# Altium PCB 106015_D3C_Single.PcbDoc
Units mil, origin at the board's own origin, x right, y up, seen from the top; angles counter-clockwise.
Board outline 4155 x 3505 mil, 2 copper layers (Top Layer, Top, Bottom Layer, Bottom); 78 components, 65 nets, 255 pads, 49 vias.
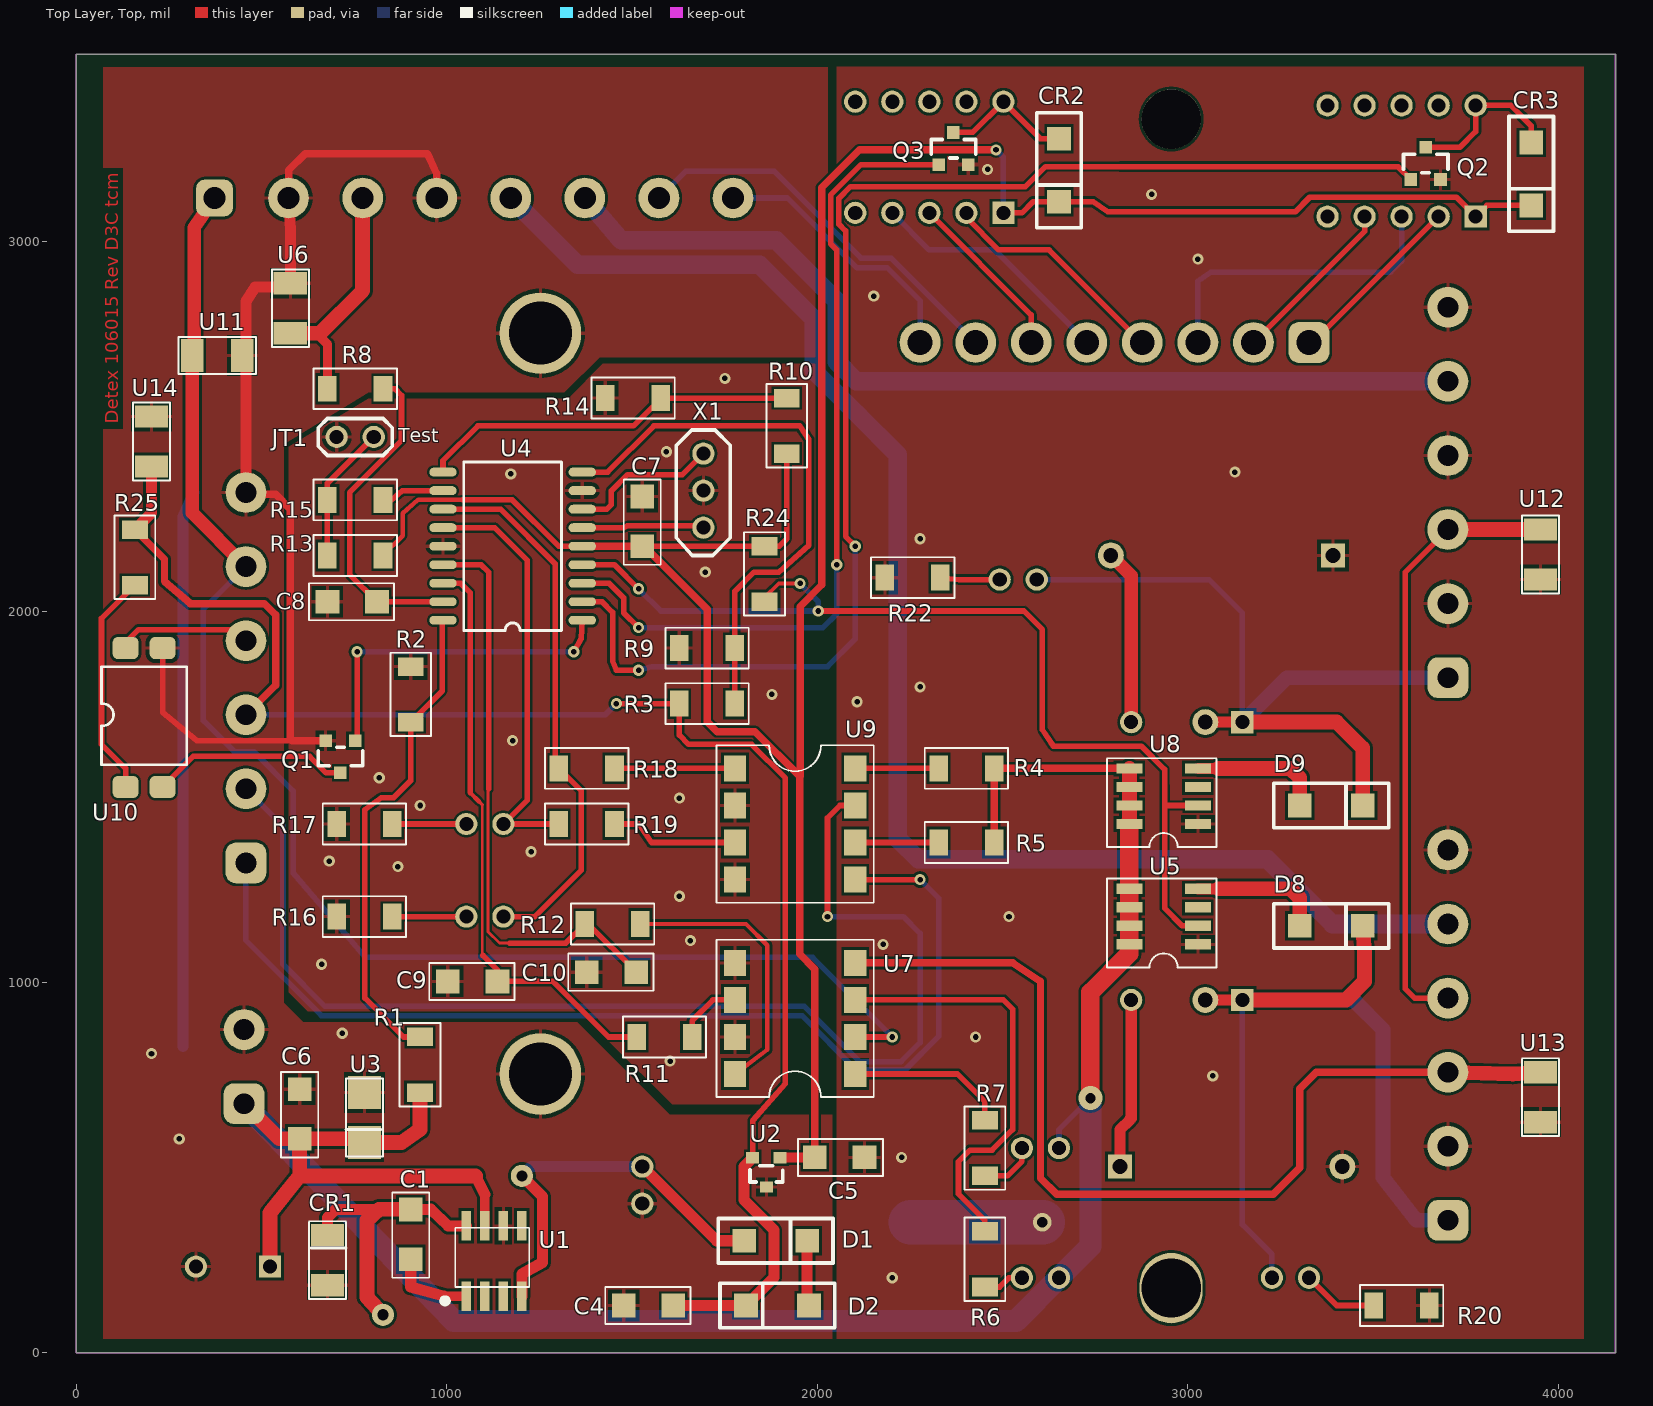
[diagram p0: Top Layer, Top view]
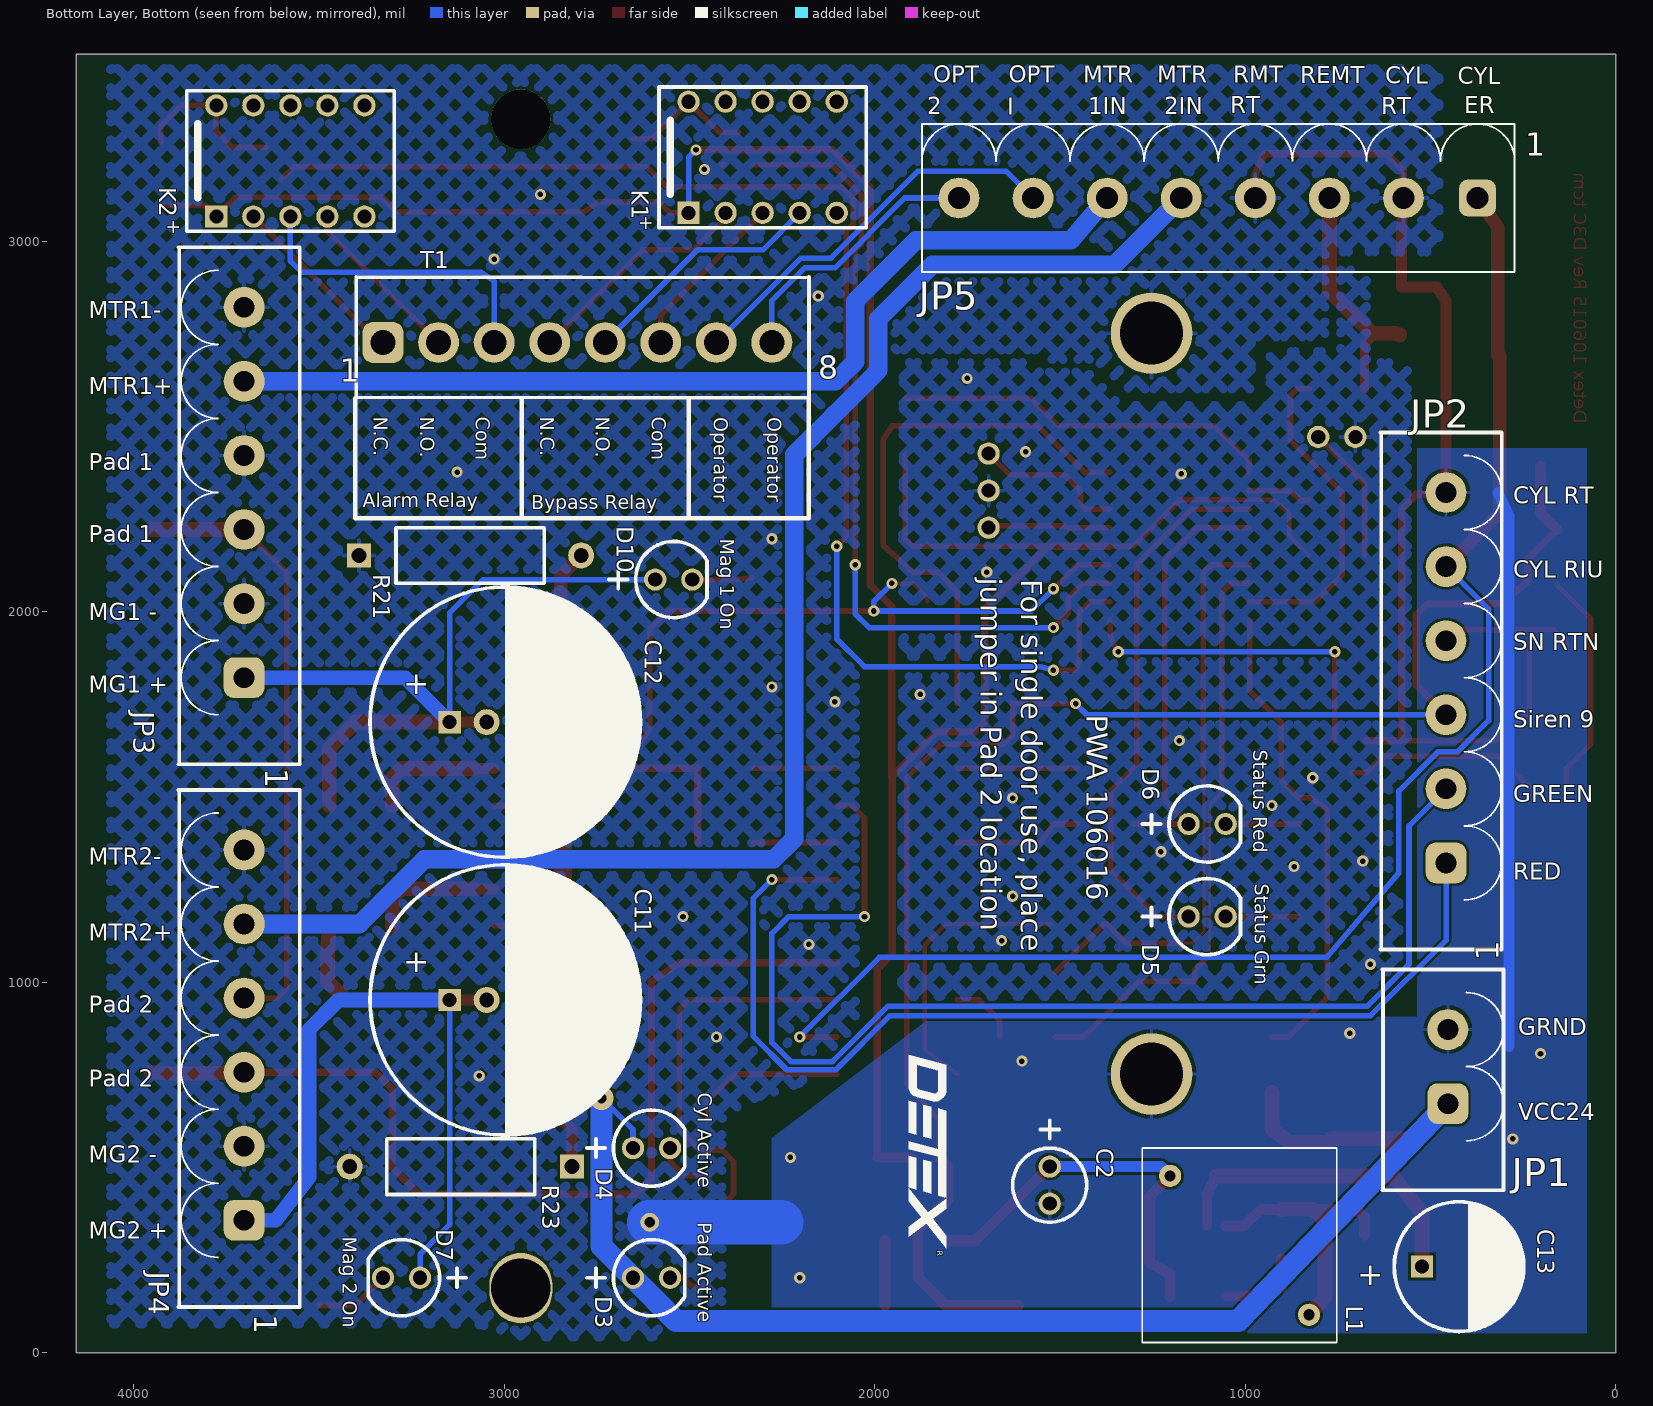
[diagram p1: Bottom Layer, Bottom view, seen from below]

## Layer stack, top to bottom
Top Solder, Top Mask: solder mask 0.4, Solder Resist, Dk 3.5
Top Layer, Top: signal copper 1.4
Dielectric 1: dielectric 12.6, FR-4, Dk 4.8
Bottom Layer, Bottom: signal copper 1.4
Bottom Solder, Bot Mask: solder mask 0.4, Solder Resist, Dk 3.5

## Board outline
0,2.5 0,0 4155,0 4155,3500 4155,3502.5 4155,3505 2.5,3505 0,3505

## Design rules (kind name [scope] priority, off if disabled: settings)
BoardOutlineClearance [All] p1: gap=15 ignorepadtopadclearanceinfootprint=FALSE except(0: Arc-SplitContinuation Track-SplitContinuation SMDPad-SplitContinuation THPad-SplitContinuation Via-SplitContinuation Fill-SplitContinuation Poly-SplitContinuation Region-SplitContinuation Text-SplitContinuation)
Clearance "Clearance_Bottom Layer, Bottom" [ExistsOnLayer('Bottom Layer, Bottom') vs ExistsOnLayer('Bottom Layer, Bottom')] p1 off: gap=7 ignorepadtopadclearanceinfootprint=FALSE
Clearance [All] p2: gap=7 ignorepadtopadclearanceinfootprint=FALSE
HoleSize [All] p1: absolutevalues=TRUE maxlimit=200 minlimit=1 maxpercent=80.000 minpercent=20.000
MinimumAnnularRing [All] p1: minimumring=5
PlaneClearance [All] p1: clearance=10
PolygonConnect [All vs IsVia] p1: connectstyle=Direct reliefconductorwidth=10 reliefentries=4 polygonreliefangle="90 Angle" airgapwidth=10
PolygonConnect PolygonConnect_1 [All] p2: connectstyle=Relief reliefconductorwidth=10 reliefentries=4 polygonreliefangle="90 Angle" airgapwidth=10
RoutingVias [All] p1: holewidth=28 width=50 viastyle="Through Hole" minholewidth=28 minwidth=50 maxholewidth=28 maxwidth=50
SilkToSilkClearance [All] p1 off: silktosilkclearance=10
SilkToSolderMaskClearance [IsPad] p1 off: minsilkscreentomaskgap=10 clearancetoexposedcopper=TRUE
SolderMaskExpansion [All] p1: expansion=4
UnConnectedPin [All] p1:
UnRoutedNet [All] p1: checkbadconnections=TRUE
Width Net_Width_3 [InNet('VIN_24')] p1: maxlimit=60 minlimit=15 preferedwidth=40
Width Net_Width_2 [InNet('MAG1OUT') Or InNet('MOTOR_1') Or InNet('MAG2OUT') Or InNet('MOTOR_2')] p2: maxlimit=60 minlimit=7 preferedwidth=30
Width Net_Width_1 [InNet('GND') Or InNet('+5V')] p3: maxlimit=200 minlimit=7 preferedwidth=15
Width [All] p4: maxlimit=100 minlimit=7 preferedwidth=10
25 further rules are at their usual default settings.

## Components (designator, comment, footprint, x,y, rotation, side; value= is the part's Value field where it differs from the comment)
C1 "10pf" CC1206_CC1206_NP(Primary) 902.5,252.5 r90 top
C2 "82 UF 35v" CAP100RP_CAP100RP(Primary) 1527.5,502.5 r270 bottom
C4 ".01" CC1206_CC1206(Primary) 1477.5,127.5 r0 top
C5 ".01" CC1206_CC1206(Primary) 2127.5,527.5 r180 top
C6 ".01" CC1206_CC1206_NP(Primary) 602.5,577.5 r90 top
C7 ".1mfd" CC1206_CC1206_NP(Primary) 1527.5,2177.5 r90 top
C8 ".1" CC1206_CC1206_NP(Primary) 677.5,2027.5 r0 top
C9 ".1" CC1206_CC1206_NP(Primary) 1002.5,1002.5 r0 top
C10 ".1" CC1206_CC1206_NP(Primary) 1377.5,1027.5 r0 top
C11 "100 uF" CAP300 3147.5,952.5 r180 bottom
C12 "100 uF" CAP300 3147.5,1702.5 r180 bottom
C13 "220uF 50v" CAP200 522.5,232.5 r180 bottom
CR1 "60V" SMBJ#1 677.5,182.5 r270 top
CR2 "{Value}" 1N4004SMT 2652.5,3277.5 r270 top
CR3 "{Value}" 1N4004SMT 3927.5,3267.5 r270 top
D1 "{Value}" 1N4004SMT 1802.5,302.5 r0 top
D2 "{Value}" 1N4004SMT 1977.5,127.5 r180 top
D3 "Blue" LED 2652.5,202.5 r180 bottom
D4 "White" LED 2652.5,552.5 r180 bottom
D5 "Green" LED 1152.5,1177.5 r180 bottom
D6 "Red" LED 1152.5,1427.5 r180 bottom
D7 "Yellow" LED 3227.5,202.5 r0 bottom
D8 "1N4937" 1N4004SMT 3302.5,1152.5 r0 top
D9 "1N4937" 1N4004SMT 3302.5,1477.5 r0 top
D10 "Yellow" LED 2592.5,2087.5 r180 bottom
JP1 "" HDR_200SP_2C 452.5,672.5 r180 bottom
JP2 "" HDR_200SP_6C 457.5,1322.5 r180 bottom
JP3 "" HDR_200SP_6C 3702.5,1822.5 r180 bottom
JP4 "" HDR_200SP_6C 3702.5,357.5 r180 bottom
JP5 "" HDR_200_8C 372.5,3117.5 r270 bottom
JT1 "TEST" JMP2 802.5,2472.5 r180 top
K1 "" AZ_940 2502.5,3077.5 r90 bottom
K2 "" AZ_940 3777.5,3067.5 r90 bottom
L1 "173" PULSE_TH_P075 1202.5,477.5 r270 bottom
Q1 "" SOT-23(GSD)_MOSFETN_SMT(Primary) 752.5,1652.5 r180 top
Q2 "" SOT-23(GSD)_MOSFETN_SMT(Primary) 3602.5,3167.5 r0 top
Q3 "" SOT-23(GSD)_MOSFETN_SMT(Primary) 2327.5,3207.5 r0 top
R1 "240k" RES_1206 927.5,852.5 r270 top
R2 "100k" RES_1206 902.5,1852.5 r270 top
R3 "10M" RES_1206 1777.5,1752.5 r180 top
R4 "1.5k" RES_1206 2477.5,1577.5 r180 top
R5 "1.5k" RES_1206 2477.5,1377.5 r180 top
R6 "1.5k" RES_1206 2452.5,177.5 r90 top
R7 "1.5k" RES_1206 2452.5,477.5 r90 top
R8 "10k" RES_1206 677.5,2602.5 r0 top
R9 "5.6M" RES_1206 1627.5,1902.5 r0 top
R10 "100k" RES_1206 1917.5,2577.5 r270 top
R11 "10k" RES_1206 1512.5,852.5 r0 top
R12 "10k" RES_1206 1522.5,1157.5 r180 top
R13 "10k" RES_1206 827.5,2152.5 r180 top
R14 "100k" RES_1206 1427.5,2577.5 r0 top
R15 "10k" RES_1206 827.5,2302.5 r180 top
R16 "330" RES_1206 702.5,1177.5 r0 top
R17 "330" RES_1206 702.5,1427.5 r0 top
R18 "330" RES_1206 1302.5,1577.5 r0 top
R19 "330" RES_1206 1302.5,1427.5 r0 top
R20 "1.5k" RES_1206 3502.5,127.5 r0 top
R21 "10 Ohms" RES600 3392.5,2152.5 r180 bottom
R22 "1.5k" RES_1206 2332.5,2092.5 r180 top
R23 "10 Ohms" RES600 2817.5,502.5 r0 bottom
R24 "100k" RES_1206 1857.5,2177.5 r270 top
R25 "2.2kk" RES_1206 157.5,2222.5 r270 top
T1 "" HDR_381MSP_8C 3327.5,2727.5 r270 bottom
U1 "" S08 1052.5,152.5 r90 top
U2 "" SOT-23 1902.5,527.5 r180 top
U3 "SMBJ43" SMBJ#2 777.5,702.5 r90 top
U4 "" SOIC18 1177.5,2177.5 r180 top
U5 "" IPS511G 3027.5,1102.5 r180 top
U6 "6.3v" D0214 577.5,2752.5 r270 top
U7 "" MCT9001 2102.5,752.5 r180 top
U8 "" IPS511G 3027.5,1427.5 r180 top
U9 "" MCT9001 1777.5,1577.5 r0 top
U10 "" SFH6168 132.5,1527.5 r90 top
U11 "7.5" D0214 447.5,2692.5 r0 top
U12 "7.5" D0214 3952.5,2222.5 r90 top
U13 "7.5" D0214 3952.5,757.5 r90 top
U14 "12v" D0214 202.5,2527.5 r90 top
X1 "8 Mhz" RES_CER 1692.5,2227.5 r90 top

## Footprints (in the part's own frame and the unit in brackets; to place one, negate y for a bottom-side part, rotate by r counter-clockwise, add the part's x,y. Pads: shape width x height; smd on the part's side, far side on the other; paste and mask are expansions set on the pad)
1N4004SMT [mil]
  rect 64x64 smd: 1(0,0) 2(170,0)
  silkscreen extent -70,-60 240,60
AZ_940 [mil]
  rect 60x60 hole 38: 1(0,0)
  round 60 hole 38: 2(0,-100) 3(0,-200) 4(0,-300) 5(0,-400) 6(300,-400) 7(300,-300) 8(300,-200) 9(300,-100) 10(300,0)
  silkscreen extent -40,-480 340,80
CAP100RP_CAP100RP(Primary) [mil]
  round 60 hole 38: MINUS(100,0) PLUS(0,0)
  silkscreen extent -125,-100 150,100
CAP200 [mil]
  rect 60x60 hole 38: 1(0,0)
  round 60 hole 38: 2(200,0)
  silkscreen extent -75,-175 275,175
CAP300 [mil]
  rect 60x60 hole 38: 1(0,0)
  round 60 hole 38: 2(300,0)
  silkscreen extent -215,-365 515,365
CC1206_CC1206(Primary) [mil]
  rect 64x64 smd: A(0,0) B(134,0)
  silkscreen extent -50,-50 180,50
CC1206_CC1206_NP(Primary) [mil]
  rect 64x64 smd: A(0,0) B(134,0)
  silkscreen extent -50,-50 180,50
D0214 [mil]
  rect 60x90 smd: 1(0,0) 2(-135,0)
  silkscreen extent -172,-50 38,50
HDR_200_8C [mil]
  rrect50% 100x100 hole 60: 1(0,0)
  round 110 hole 60: 2(0,-200) 3(0,-400) 4(0,-600) 5(0,-800) 6(0,-1000) 7(0,-1200) 8(0,-1400)
  silkscreen extent -200,-1500 200,100
HDR_200SP_2C [mil]
  rrect50% 110x110 hole 56: 1(0,0)
  round 110 hole 56: 2(0,200)
  silkscreen extent -177,-234 150,362
HDR_200SP_6C [mil]
  rrect50% 110x110 hole 56: 1(0,0)
  round 110 hole 56: 2(0,200) 3(0,400) 4(0,600) 5(0,800) 6(0,1000)
  silkscreen extent -177,-234 150,1162
HDR_381MSP_8C [mil]
  rrect50% 110x110 hole 67: 1(0,0)
  round 110 hole 67: 2(0,150) 3(0,300) 4(0,450) 5(0,600) 6(0,750) 7(0,900) 8(0,1050)
  silkscreen extent -177,-72 150,1150
IPS511G [mil]
  rect 70x28 smd: 1(0,0) 2(0,-50) 3(0,-100) 4(0,-150) 5(185,-150) 6(185,-100) 7(185,-50) 8(185,0)
  silkscreen extent -50,-178 245,63
JMP2 [mil]
  round 60 hole 38: 1(0,0) 2(100,0)
  silkscreen extent -50,-50 150,50
LED [mil]
  round 60 hole 38: 1(0,0) 2(100,0)
  silkscreen extent -125,-103 140,103
MCT9001 [mil]
  rect 60x70 smd: 1(0,0) 2(0,-100) 3(0,-200) 4(0,-300) 5(325,-300) 6(325,-200) 7(325,-100) 8(325,0)
  silkscreen extent -50,-362 375,63
PULSE_TH_P075 [mil]
  round 60 hole 30: 1(0,0) 2(375,375)
  silkscreen extent -75,-75 450,450
RES600 [mil]
  rect 65x65 hole 40: 1(0,0)
  round 70 hole 40: 2(600,0)
  silkscreen extent 100,-75 500,75
RES_1206 [mil]
  rect 50x70 smd: 1(0,0) 2(150,0)
  silkscreen extent -38,-55 188,55
RES_CER [mil]
  round 60 hole 38: 1(0,0) 2(100,0) 3(200,0)
  silkscreen extent -75,-72 264,73
S08 [mil]
  rect 80x26 smd: 1(0,0) 2(0,-50) 3(0,-100) 4(0,-150) 5(190,-150) 6(190,-100) 7(190,-50) 8(190,0)
  silkscreen extent -25,-170 185,71
SFH6168 [mil]
  rrect50% 60x70 smd: 1(0,0) 2(0,-100) 3(375,-100) 4(375,0)
  silkscreen extent 60,-165 325,65
SMBJ#1 [mil]
  rect 60x90 smd: 1(0,0) 2(-135,0)
  silkscreen extent -172,-50 38,50
SMBJ#2 [mil]
  rect 90x90 smd: 1(0,0) 2(-135,0)
  silkscreen extent -172,-50 38,50
SOIC18 [mil]
  oval 74x24 smd: 1(-188,200) 2(-188,150) 3(-188,100) 4(-188,50) 5(-188,0) 6(-188,-50) 7(-188,-100) 8(-188,-150) 9(-188,-200) 10(188,-200) 11(188,-150) 12(188,-100) 13(188,-50) 14(188,0) 15(188,50) 16(188,100) 17(188,150) 18(188,200)
  silkscreen extent -132,-227 132,227
SOT-23 [mil]
  rect 35x31 smd: 1(3,1) 2(77,1) 3(40,80)
SOT-23(GSD)_MOSFETN_SMT(Primary) [mil]
  rect 34x34 smd: D(40,87) G(0,0) S(80,0)
  silkscreen extent -20,18 100,68

## Part data
C4 C5 C6 C7 C8 C9 C10: "Capacitor"
C12: "Nichicon UP2A101MHD"
CR1: "Tunnel Diode"
CR2 CR3: "Diode"
Q1 Q2 Q3: "N-Channel, MOSFET Transistor"
R1 R2 R3 R4 R5 R6 R7 R8 R9 R10 R11 R12 R13 R14 R15 R16 R17 R18 R19 R20 R22 R24 R25: "Resistor"
U2: "PNP Darlington Bipolar Transistor"

## Free pads (board coordinates)
  round 220 hole 170: 0(1252.5,752.5) 0(1252.5,2752.5)
  oval 170x190 hole 160 unplated: 0(2955.5,174.5)
  round 160 hole 160 unplated: 0(2955.5,3330.5)
  round 70 hole 40: 0(3047.5,952.5) 0(3047.5,1702.5)

## Via types
v1: diameter 30, hole 15, Top Layer, Top to Bottom Layer, Bottom, 45 vias
v2: diameter 30, hole 15, Top Layer, Top to Bottom Layer, Bottom, tented both sides, 2 vias
v3: diameter 64, hole 28, Top Layer, Top to Bottom Layer, Bottom, 1 vias
v4: diameter 50, hole 28, Top Layer, Top to Bottom Layer, Bottom, 1 vias

## Nets (pads, with @x,y where several pads share a name; then routed paths per layer and width w, separated by ;. In a path a pad name is that pad's centre, name@x,y a point inside that pad or via, vN(x,y) a via of type N, cw(c..) or ccw(c..) an arc to the next point about the centre after c; other vN are vias at no path point)
9VOPTO: R25.2 U10.1 | length 609.2
  Top Layer, Top w15: U10.1 132.5,1577.5 67.5,1642.5 67.5,1982.5 R25.2
2674_FB: C2.PLUS D1.1 L1.1 U1.4 | length 1057.6
  Top Layer, Top w30: U1.4 1202.5,212.5 1258,243.33 1258,422 L1.1 ; C2.PLUS 1727.5,302.5 D1.1
  Bottom Layer, Bottom w30: L1.1@1214,489 1227.5,502.5 C2.PLUS
+5V: C5.B C7.A CR2.2 CR3.2 K1.1 K2.1 R10.2 R13.1 R24.1 U2.1 U4.5 | length 7285.1
  Top Layer, Top w12: R13.1 880.9,2205.9 880.9,2266.84 922.5,2302.5 1042.5,2302.5
  Top Layer, Top w15: 1042.5,2302.5 1176.5,2302.5 1301.5,2177.5 U4.5 ; C7.A 1532.5,2177.5 R24.1 ; R24.1@1857.5,2182.5 R24.1 ; U2.1@1892.5,527.5 U2.1 ; R10.2 1917.5,2197.5 1897.5,2177.5 R24.1 ; C5.B@1992.5,527.5 C5.B ; K1.1 2552.5,3077.5 2582.5,3107.5 CR2.2 2745.36,3107.5 2783.93,3080.5 3290.5,3080.5 3329.54,3119.54 3725.46,3119.54 K2.1 3807.5,3097.5 CR3.2
  Top Layer, Top w20: U4.5 C7.A ; C7.A@1532.5,2177.5 1702.5,2007.5 1702.5,1703.5 1729.3,1676.7 1831.9,1676.7 1952.5,1556.1 1952.5,1076.6 1993.5,1035.6 C5.B ; 1953.25,1555.35 1953.54,1555.64 1953.54,2014.8 2011.5,2072.76 2011.5,3145.01 2113.99,3247.5 v2(2482.5,3247.5)
  Top Layer, Top w28: U2.1 C5.B@1992.5,527.5
  Bottom Layer, Bottom w15: v2(2482.5,3247.5) 2502.5,3227.5 K1.1
ALMC: K2.3 T1.3 | length 855.4
  Bottom Layer, Bottom w15: T1.3 3027.5,2892.5 3062.5,2917.5 3547.5,2917.5 3577.5,2947.5 K2.3
ALMNC: K2.2 T1.1 | length 490.8
  Top Layer, Top w15: T1.1 3337.5,2727.5 K2.2
ALMNO: K2.4 T1.2 | length 464.3
  Top Layer, Top w15: T1.2 3477.5,3027.5 K2.4
ALRM_CNTRL: Q2.G U4.2 | length 3731.8
  Top Layer, Top w15: U4.2 1419,2027.5 1447.5,1999 1447.5,1867.5 1457.5,1842.5 v1(1517.5,1842.5) ; v1(2102.5,2177.5) 2076.33,2203.67 2076.33,3028.67 2058,3047 2058,3116.39 2089.94,3148.33 2562.01,3148.33 2616.18,3202.5 2815,3202.5 2817.3,3201.75 3568.25,3201.75 Q2.G
  Bottom Layer, Bottom w15: v1(1517.5,1842.5) 1552.5,1852.5 2028.1,1852.5 2102.5,1926.9 v1(2102.5,2177.5)
BAT_CHECK_IN: R3.1 R9.2 U4.9 | length 1521.1
  Top Layer, Top w15: U4.9 1433.77,2377.5 1558.77,2502.5 1952.5,2502.5 1977.5,2465 1977.5,2179.97 1895.97,2107.5 1829.2,2107.5 1777.5,2055.8 R9.2 R3.1
BPC: K1.3 T1.6 | length 463.9
  Top Layer, Top w15: K1.3 2302.5,3077.25 2577.5,2802.25 T1.6
BPNC: K1.2 T1.4 | length 627.6
  Top Layer, Top w15: K1.2 2402.5,3064.4 2489.4,2977.5 2625.5,2977.5 2875.5,2727.5 T1.4
BPNO: K1.4 T1.5 | length 671.1
  Bottom Layer, Bottom w15: K1.4 2202.5,3077 2302,2977.5 2479,2977.5 2727.5,2729 T1.5
BYPS_CNTRL: Q3.G U4.3 | length 2238.9
  Top Layer, Top w15: U4.3 1438.1,2077.5 1477.5,2038.1 1477.5,1997.5 v1(1517.5,1957.5) ; v1(2052.5,2127.5) 2052.5,2977.5 2036,2994 2036,3125.5 2118,3207.5 Q3.G
  Bottom Layer, Bottom w15: v1(1517.5,1957.5) 2015.1,1957.5 2052.5,1994.9 v1(2052.5,2127.5)
CYL_OUT: JP2.5 JP5.1 U7.2 U11.2 | length 3994.9
  Top Layer, Top w15: U7.2 v1(2202.5,852.5)
  Top Layer, Top w36: JP5.1 317.5,3037.5 317.5,2692.5 U11.2 312.5,2267.5 JP2.5
  Bottom Layer, Bottom w15: JP2.5 342.5,2007.5 342.5,1706.4 426.4,1622.5 479.25,1622.5 585,1516.75 585,1295.02 780.01,1067.5 1987.5,1067.5 v1(2202.5,852.5)
CYL_OUTPUT: C10.B R12.2 U4.15 | length 1591
  Top Layer, Top w8: 1112.5,1522.5 1111.5,1521.5 1111.5,1472.87 1111.25,1472.62 1111.25,1136.35 1141.7,1105.9 1169.11,1105.9
  Top Layer, Top w15: U4.15 1092.5,2127.5 1112.5,2107.5 1112.5,1522.5 ; 1169.11,1105.9 1320.9,1105.9 R12.2 1381.5,1157.5 C10.B
CYL_SERIES: R12.1 U7.8 | length 757.6
  Top Layer, Top w12: R12.1 1807.5,1157.5 1865,1100 1865,818.12 U7.8
GND: C2.MINUS C4.A C5.A C6.B C7.B C8.A C9.A C10.A C13.2 CR1.1 JP1.2 JP2.6 JP3.2 JP3.4 JP3.6 JP4.2 JP4.6 JP5.2 JP5.4 JT1.2 pad.0@1252.5,752.5 pad.0@1252.5,2752.5 Q1.S Q2.S Q3.S R2.1 R9.1 R14.1 R16.1 R17.1 R20.2 R21.1 R22.2 R23.2 U1.6 U2.3 U3.1 U4.8 U4.14 U5.1 U6.2 U7.5 U7.7 U8.1 U9.2 U9.4 U10.3 U11.1 U12.2 U13.2 U14.1 X1.2 | length 4789
  Top Layer, Top w15: U10.3 232.5,1729.72 325.16,1652.5 582.5,1652.5 ; JP2.6 457.5,2302.5 JP2.6@462.5,2317.5 ; U6.2@577.5,2877.5 U6.2 ; Q3.S Q3.S@2412.5,3207.5
  Top Layer, Top w20: JP2.6@462.5,2317.5 537.5,2317.5 577.5,2277.5 577.5,1660.83 582.5,1652.5 Q1.S ; JP5.2 572.5,3192.5 617.5,3237.5 947.5,3237.5 972.5,3182.5 JP5.4
  Top Layer, Top w30: JP2.6 457.5,2837.5 482.5,2877.5 U6.2@577.5,2877.5 ; JP5.2 577.5,3032.5 U6.2
  Bottom Layer, Bottom w30: 287.5,827.5 287.5,2257.5 317.5,2322.5
  Bottom Layer, Bottom w120: 2252.5,352.5 v4(2607.5,352.5) v4@2609,352.5
  other v1: 2202.5,202.5 2227.5,527.5 277.5,577.5 3067.5,747.5 1602.5,787.5 202.5,807.5 2427.5,852.5 717.5,862.5 661.94,1049 2177.5,1102.5 1657.5,1112.5 2517.5,1177.5 1627.5,1232.5 867.5,1312.5 682.5,1327.5 1227.5,1352.5 927.5,1477.5 1627.5,1497.5 817.5,1552.5 1177.5,1652.5 2107.5,1757.5 1877.5,1777.5 2277.5,1797.5 1697.5,2107.5 2277.5,2197.5 1172.5,2372.5 3127.5,2377.5 1592.5,2432.5 1750.62,2630.43 2152.5,2852.5 3027.5,2952.5 2902.5,3127.5
  other v2: 2460,3195
GREEN_DRIVE: D5.1 R18.1 U4.12 | length 1482.3
  Top Layer, Top w15: U4.12 1144.9,2277.5 1292.2,2130.2 1292.2,1587.8 R18.1 1362.5,1517.5 1362.5,1302.5 1237.5,1177.5 D5.1
GREEN_OUT: JP2.2 U9.7 | length 3284
  Top Layer, Top w15: v1(2027.5,1177.5) 2027.5,1443.9 2061.1,1477.5 U9.7
  Bottom Layer, Bottom w15: JP2.2 557.5,1422.5 557.5,1048.8 671.3,935 1965,935 2114,786 2226,786 2277.5,837.5 2277.5,1132 2232,1177.5 v1(2027.5,1177.5)
MAG1_SWITCHED: D8.1 U5.4 | length 360.4
  Top Layer, Top w30: U5.4 3082.5,1252.5
  Top Layer, Top w40: 3082.5,1252.5 3277.5,1252.5 3302.5,1227.5 D8.1
MAG1OUT: C11.1 D7.1 D8.2 JP4.1 pad.0@3047.5,952.5 | length 2428.2
  Top Layer, Top w30: pad.0@3047.5,952.5 C11.1
  Top Layer, Top w40: C11.1 3427.5,952.5 3477.5,1002.5 3477.5,1077.5 D8.2
  Bottom Layer, Bottom w15: C11.1 3147.5,345.97 3227.5,265.97 D7.1
  Bottom Layer, Bottom w40: C11.1 3447.5,952.5 3527.5,872.5 3527.5,472.93 3617.28,357.5 JP4.1
MAG2_SWITCHED: D9.1 U8.4 | length 360.4
  Top Layer, Top w30: U8.4 3082.5,1577.5
  Top Layer, Top w40: 3082.5,1577.5 3277.5,1577.5 3302.5,1552.5 D9.1
MAG2OUT: C12.1 D9.2 D10.1 JP3.1 pad.0@3047.5,1702.5 | length 2101
  Top Layer, Top w30: pad.0@3047.5,1702.5 C12.1
  Top Layer, Top w40: C12.1 3402.5,1702.5 3472.5,1632.5 D9.2
  Bottom Layer, Bottom w15: D10.1 3057.5,2087.5 3147.5,1997.5 C12.1
  Bottom Layer, Bottom w40: C12.1 3267.5,1822.5 JP3.1
MAG_CNTRL: R24.2 U4.4 U5.2 U8.2 | length 2762
  Top Layer, Top w10: R24.2 1857.5,2038.8 1895.7,2077 v1(1953.41,2077)
  Top Layer, Top w15: U4.4 1452.5,2127.5 v1(1517.5,2062.5) ; v1(2002.5,2002.5) 2557.5,2002.5 2607.5,1952.5 2607.5,1682.5 2637.5,1637.5 2875.15,1637.5 2937.65,1575.01 2937.98,1477.5 ; U5.2 2985.3,1152.5 2937.5,1200.3 2937.5,1472.5 ; U8.2 2937.98,1477.5 ; 2937.5,1472.5 2937.98,1477.5 ; 2937.5,1472.5 2937.5,1477.5 2937.98,1477.5
  Bottom Layer, Bottom w15: v1(1517.5,2062.5) 1577.5,2002.5 v1(2002.5,2002.5) 2002.5,2027.91 v1(1953.41,2077)
MOTOR_1: JP3.5 JP5.6 | length 2636.3
  Bottom Layer, Bottom w50: JP5.6 1470.64,3003 1888.9,3003 2052.5,2839.4 2052.5,2675.5 2105.5,2622.5 JP3.5
MOTOR_2: JP4.5 JP5.5 | length 4031.1
  Bottom Layer, Bottom w50: JP5.5 1353.26,2936.74 1844.92,2936.74 1990,2791.66 1990,2652 2110,2532 2217.5,2424.5 2217.5,1387.5 2273,1332 3216.45,1332 3390.95,1157.5 JP4.5
NET00004: D5.2 R16.2 | length 200
  Top Layer, Top w15: R16.2 D5.2
NET00007: C12.2 R21.2 | length 472.8
  Top Layer, Top w36: R21.2 2847.5,2097.5 2847.5,2037.5 C12.2
NET00008: D6.2 R17.2 | length 200
  Top Layer, Top w15: R17.2 D6.2
NET00011: JP5.3 R8.1 U6.1 | length 675
  Top Layer, Top w20: U6.1@582,2752.5 U6.1@582.5,2747.5
  Top Layer, Top w25: U6.1 582,2752.5 U6.1@596.59,2752.5 ; 652.5,2752.5 647.5,2752.5 677.5,2722.5 R8.1
  Top Layer, Top w40: U6.1@582.5,2747.5 596.59,2752.5 647.5,2752.5 ; 652.5,2752.5 657.5,2752.5 772.5,2867.5 JP5.3
NET00014: U4.7 X1.3 | length 411.1
  Top Layer, Top w15: U4.7 1431.84,2277.5 1444.03,2289.69 1444.03,2327.17 1487.62,2370.76 1635.76,2370.76 X1.3
NET00015: U4.6 X1.1 | length 349
  Top Layer, Top w15: U4.6 1477.5,2227.5 1487.5,2232.5 1687.5,2232.5 1702.5,2227.5 X1.1
NET00019: R6.2 U7.3 | length 1160.6
  Top Layer, Top w15: U7.3 2502.5,952.5 2527.5,927.5 2527.5,602.5 2472.2,547.2 2412.2,547.2 2381.2,516.2 2381.2,428.7 2452.5,357.4 R6.2
NET00020: CR2.1 K1.10 Q3.D | length 360.8
  Top Layer, Top w15: Q3.D 2419.5,3294.5 K1.10 2602.5,3277.5 CR2.1
NET00021: R7.2 U7.1 | length 431.5
  Top Layer, Top w15: U7.1 2378.2,752.5 2452.5,678.2 R7.2
NET00023: CR3.1 K2.10 Q2.D | length 440.9
  Top Layer, Top w15: Q2.D 3735.1,3254.5 3777.5,3296.9 K2.10 3872.5,3367.5 3927.5,3312.5 CR3.1
NET00024: C11.2 R23.1 | length 462.4
  Top Layer, Top w30: R23.1 2817.5,602.5 2843.6,628.6 2843.6,629.3 2847.5,633.2 C11.2
NET00038: R19.2 U9.3 | length 351
  Top Layer, Top w15: R19.2 1517.5,1427.5 1552.5,1377.5 U9.3
NET00039: R18.2 U9.1 | length 325
  Top Layer, Top w15: R18.2 U9.1
NET00041: R4.2 U9.8 | length 225
  Top Layer, Top w15: U9.8 R4.2
NET00042: R10.1 R14.2 U4.10 | length 1029.6
  Top Layer, Top w15: U4.10 989.5,2408.5 1083.5,2502.5 1503.5,2502.5 1577.5,2576.5 R14.2 R10.1
NET00044: R5.2 U9.6 | length 225
  Top Layer, Top w15: U9.6 R5.2
NET00047: D10.2 R22.1 | length 160.2
  Top Layer, Top w15: R22.1 2382.5,2087.5 D10.2
NET00048: D7.2 R20.1 | length 206.1
  Top Layer, Top w15: D7.2 3402.5,127.5 R20.1
NET00049: D3.2 R6.1 | length 110.4
  Top Layer, Top w15: R6.1 2492.3,177.5 2517.3,202.5 D3.2
NET00050: D4.2 R7.1 | length 152.2
  Top Layer, Top w15: R7.1 2513.5,477.5 2552.5,516.5 D4.2
NET00053: D1.2 D2.1 | length 175
  Top Layer, Top w30: D2.1@1972.5,127.5 D1.2
NET00057: C1.B CR1.2 L1.2 U1.8 | length 852.1
  Top Layer, Top w30: CR1.2 677.5,364.6 700.39,387.49 816.84,386.92 C1.B 956.38,387.4 1003.64,341.69 U1.8
  Top Layer, Top w40: L1.2 784,149.95 784,357.72 816.84,386.92 817.5,387.5 C1.B
NET00058: C1.A U1.1 | length 228.4
  Top Layer, Top w26: 992.5,152.5 U1.1
  Top Layer, Top w30: C1.A 902.5,177.5 992.5,152.5
OPERATOR_1: JP5.8 T1.8 | length 732.7
  Bottom Layer, Bottom w15: JP5.8 1919.2,3117.5 2107.7,2929 2189,2929 2277.5,2840.5 T1.8
OPERATOR_2: JP5.7 T1.7 | length 1076.6
  Bottom Layer, Bottom w15: JP5.7 1645,3190 1883.5,3190 2118,2955.5 2199.5,2955.5 T1.7
PAD_0UT: JP4.3 U7.4 U13.1 | length 2676
  Top Layer, Top w20: U7.4 2527.5,1052.5 2602.5,1002.5 2602.5,471.59 2646.59,427.5 3230.5,427.5 3302.5,499.5 3302.5,712.5 3347.5,757.5 JP4.3
  Top Layer, Top w40: JP4.3 3877.5,752.5 U13.1
PAD_INTER: JP3.3 JP4.4 U12.1 | length 1663
  Top Layer, Top w15: JP4.4 3612.5,957.5 3587.5,982.5 3587.5,2107.5 JP3.3
  Top Layer, Top w40: JP3.3 U12.1
PAD_OUTPUT: C9.B R11.1 U4.16 | length 1602
  Top Layer, Top w8: 1095.5,1074.5 1095.5,1479.5
  Top Layer, Top w10: 1087.5,1487.5 1095.5,1479.5 ; 1095.5,1074.5 1097.5,1072.5
  Top Layer, Top w12: 1062.5,1512.5 1087.5,1487.5
  Top Layer, Top w15: U4.16 1037.2,2077.5 1062.5,2052.2 1062.5,1512.5 ; 1097.5,1072.5 1136.5,1033.5 C9.B 1286.87,1002.5 1436.87,852.5 R11.1
PAD_SERIES: R11.2 U7.6 | length 182.2
  Top Layer, Top w15: R11.2 1662.5,896.5 1718.5,952.5 U7.6
RED_DRIVE: D6.1 R19.1 U4.13 | length 1152.7
  Top Layer, Top w15: U4.13 1128.9,2227.5 1217.1,2139.3 1217.1,1492.1 D6.1 R19.1
RED_OUT: JP2.1 U9.5 | length 2880.2
  Top Layer, Top w15: U9.5 v1(2277.5,1277.5)
  Bottom Layer, Bottom w15: JP2.1 457.5,1113.5 661,910 1958.89,910 2104.89,764 2237.4,764 2327.5,854.1 2327.5,1227.5 v1(2277.5,1277.5)
REMOTE_IN: C8.B R8.2 U4.17 | length 881.2
  Top Layer, Top w15: R8.2 859.74,2602.5 877.5,2584.74 877.5,2462.5 737.5,2322.5 737.5,2101.5 C8.B U4.17
S_OPTO_CNTL: Q1.D U10.2 | length 532.5
  Top Layer, Top w15: U10.2 314.9,1609.9 629.2,1609.9 673.6,1565.5 Q1.D
SIREN_CNTRL: Q1.G U4.1 | length 915.4
  Top Layer, Top w15: Q1.G@757.5,1652.5 v1(757.5,1892.5) ; v1(1342.5,1892.5) 1362.5,1927.5 U4.1
  Bottom Layer, Bottom w15: v1(757.5,1892.5) v1(1342.5,1892.5)
SIREN_OUT: JP2.4 U10.4 | length 369.7
  Top Layer, Top w15: U10.4 132.5,1917.2 167.7,1952.4 436.14,1952.4 JP2.4
TEST: JT1.1 R13.2 R15.2 | length 371.8
  Top Layer, Top w15: R13.2 R15.2 677.5,2347.5 JT1.1
TEST_IN: R15.1 U4.11 | length 171.8
  Top Layer, Top w15: R15.1 847.48,2300.68 879.66,2327.5 U4.11
VCC9_DIODE: C4.B D2.2 JP2.3 R3.2 R25.1 U2.2 U14.2 | length 4331.6
  Top Layer, Top w15: v1(1457.5,1752.5) R3.2 1627.5,1667.5 1652.5,1642.5 1822.8,1642.5 1914,1551.3 1914,726.56 1825.5,627 U2.2 1822.5,522.5 U2.2@1822.5,523.5
  Top Layer, Top w20: R25.1 237.5,2142.5 237.5,2082.5 307.5,2022.5 507.5,2022.5 537.4,1992.6 537.4,1802.4 JP2.3
  Top Layer, Top w30: R25.1 202.5,2267.5 U14.2 ; C4.B D2.2 1883.1,203.1 1883.1,330.8 1801.7,412.2 1801.7,502.7 U2.2@1822.5,523.5
  Bottom Layer, Bottom w15: JP2.3 1427.5,1722.5 v1(1457.5,1752.5)
VCC_24_CHECK: R1.1 R2.2 U4.18 | length 1318.1
  Top Layer, Top w15: R2.2@902.5,1697.5 902.5,1544.6 856.6,1498.7 822.43,1498.7 778.65,1465.86 778.65,957.25 883.4,852.5 R1.1 ; R2.2 903.11,1702.5 987.5,1786.89 U4.18@987.5,1977.5
VIN_24: C6.A C13.1 D3.1 D4.1 JP1.1 R1.2 R4.1 R5.1 U1.7 U3.2 U5.5 U5.6 U5.7 U5.8 U8.5 U8.6 U8.7 U8.8 | length 6298.1
  Top Layer, Top w20: R5.1 R4.1 U8.5
  Top Layer, Top w26: U1.7 1102.5,427.5
  Top Layer, Top w30: 1077.5,477.5 1102.5,427.5
  Top Layer, Top w40: JP1.1 547.5,577.5 C6.A 767.5,577.5 U3.2 877.5,567.5 927.5,602.5 R1.2 ; C13.1 522.5,377.5 602.5,477.5 ; C6.A@602.1,570.9 602.5,477.5 ; 1077.5,477.5 602.5,477.5 ; U8.8 U8.7 U8.6 U8.5
  Top Layer, Top w50: v3(2737.5,687.5) 2737.5,972.68 2842.5,1077.68 U5.8 U5.7 U5.6 U5.5 U8.8
  Bottom Layer, Bottom w15: D4.1 2652.5,602.5 v3(2737.5,687.5)
  Bottom Layer, Bottom w60: JP1.1 1018.42,86 2536,86 D3.1 2737.5,287.5 v3(2737.5,687.5)
pads on no net: K1.5 K1.6 K1.7 K1.8 K1.9 K2.5 K2.6 K2.7 K2.8 K2.9 U1.2 U1.3 U1.5 U5.3 U8.3

## Polygon pours and split planes (outlines as drawn)
GND on Top Layer, Top "GND_L01_P016" (solid, remove dead copper, pour order 16): 573.25,2446.63 787.09,2576 88239.78,2580 1327.25,2576 1421.25,2670 1572.83,2670 2043.92,2670 2043.92,1833.42 2007.25,1796.75 2007.25,670.25 1607.75,670.25 1356.25,921.75 624.25,921.75 573.25,972.75
GND on Top Layer, Top "GND_L01_P014" (solid, remove dead copper, pour order 14): 72.5,37.5 72.5,3470 2028.62,3470 2028.62,2688 1413,2688 1317.5,2592.5 789.2,2592.5 560,2452.5 560,944.75 612.75,892 1170,892 1352,892 1601.5,642.5 2040,642.5 2040,37.5
GND on Top Layer, Top "GND_L01_P012" (solid, remove dead copper, pour order 12): 2052,3472.5 2052,38 4069.4,38 4069.4,3472.5
GND on Bottom Layer, Bottom "GND_L02_P006" (hatched 45Degree grid 50 track 25, remove dead copper, pour order 6): 1922.69,2672.5 1596.18,2672.5 1572.5,2647.5 1427.5,2647.5 1337.5,2557.5 1187.5,2557.5 1142.5,2557.5 1022.5,2557.5 932.5,2557.5 932.5,2667.5 932.5,2702.5 817.5,2702.5 742.5,2702.5 742.5,2767.5 742.5,2782.5 742.5,2822.5 742.5,2857.5 742.5,2877.5 742.5,2892.5 742.5,2922.5 677.5,2922.5 672.5,2917.5 672.5,2672.5 592.5,2672.5 562.24,2656 562.24,924.01 1927.51,925.5
GND on Bottom Layer, Bottom "GND_L02_P008" (solid, remove dead copper, pour order 8): 77.5,52.5 2277.5,52.5 2277.5,579 1846.25,907.5 535,907.5 535,2442.5 77.5,2442.5 77.5,977.5
GND on Bottom Layer, Bottom "GND_L02_P010" (hatched 45Degree grid 50 track 25, remove dead copper, pour order 10): 2052.5,777.75 2352.5,677.5 2412.75,632.31 2412.75,42.5 2817.5,42.5 2847.5,42.5 2877.5,42.5 2927.5,42.5 2942.5,42.5 2982.5,52.5 3027.5,67.5 3047.5,72.5 3082.5,77.5 3107.5,77.5 3132.5,77.5 4062.5,77.5 4062.5,3467.5 3087.5,3467.5 2962.5,3467.5 2852.5,3467.5 2772.5,3467.5 2207.5,3467.5 1627.5,3467.5 477.5,3467.5 477.5,2972.5 784,2972.5 784,2743.25 982.5,2743.25 982.5,2602.5 1142.5,2602.5 1312.5,2602.5 1405.5,2682.5 1537.5,2682.5 1562,2707 2052.5,2707

## Keep-outs
Keep-Out Layer, Board:
  lines w1: 4154.9,3505 4154.9,0 4151.6,0 0,0 0,3505 4155,3505

## Other copper
Top Layer, Top:
  text "Detex 106015 Rev D3C tcm" at 112.5,2507.5 h35 r90

## Silkscreen, mask and mechanical layers (free items; w line width, h text height)
Top Overlay, Top Silk:
  lines w10: 1818.09,493.38 1818.09,461.23 1835,461.23 ; 1844.53,505.16 1880,505.16 ; 1890,461.23 1906.91,461.23 1906.91,492.45
  text "Test" at 868.3,2457.5 h37.5
Bottom Overlay, Bot Silk:
  region: 1847.5,515.5 1847.5,473.5 1847.5,429.5 1868.5,435.5 1868.5,521.5
  region: 1887.5,526.5 1887.5,440.5 1908.5,446.5 1908.5,532.5
  region: 1847.5,663.5 1847.5,577.5 1868.5,583.5 1868.5,669.5
  region: 1887.5,674.5 1887.5,588.5 1908.5,594.5 1908.5,680.5
  region: 1806.5,418.5 1828.5,424.5 1828.5,659.5 1806.5,653.5
  region: 1827.5,549.5 1827.5,528.5 1908.5,549.5 1908.5,571.5
  region: 1806.5,777.5 1806.5,755.5 1908.5,782.5 1908.5,804.5
  region: 1806.5,755.5 1806.5,709.5 1807.5,703.5 1808.5,698.5 1810.5,694.5 1814.5,688.5 1818.5,685.5 1820,684 1822.5,682.5 1828.5,679.5 1832.5,678.5 1837.5,677.5 1843.5,678.5 1885.5,689.5 1888.5,690.5 1892.5,692.5 1895.5,694.5 1899.5,698.5 1903.5,702.5 1904.5,704.5 1905,705.5 1905.5,707 1907.5,711.5 1908.5,717.5 1908.5,722.5 1908.5,782.5 1887,777 1887,719.5 1886.5,716.5 1885.5,714.5 1883.5,712.5 1881.5,710.5 1878.5,709.5 1862.5,705.5 1836.5,699.5 1834.5,700 1833.5,700.5 1830.5,703 1829.5,704.5 1828.5,706.5 1828.5,710.5 1828.5,761.5
  region: 1807.5,415.5 1807.5,388.5 1908.5,313.5 1908.5,340.5
  region: 1908.5,443.5 1807.5,316.5 1807.5,282.5 1908.5,409.5
  lines w12: 2177.5,2577.5 2177.5,2252.5 2652.5,2252.5 3102.5,2252.5 3402.5,2252.5 3402.5,2577.5 ; 2502.5,2252.5 2502.5,2577.5 ; 2952.5,2252.5 2952.5,2577.5
  text "REMT" at 851,3427.6 h45.62
  text "RMT" at 1032.5,3428.31 h45.62
  text "MTR" at 1237.5,3428.31 h45.62
  text "MTR" at 1437.5,3428.31 h45.62
  text "OPT" at 1637.5,3428.31 h45.62
  text "OPT" at 1842.5,3428.31 h45.62
  text "CYL" at 622,3426 h45.62
  text "CYL" at 426.25,3424.75 h45.62
  text "ER" at 408,3346 h45.62
  text "RT" at 1040,3346 h45.62
  text "RT" at 632,3344 h45.62
  text "2IN" at 1218,3344 h45.62
  text "1IN" at 1423.5,3343.5 h45.62
  text "2" at 1858,3343.5 h45.62
  text "I" at 1642,3342 h45.62
  text "MTR1-" at 4122.5,2792.5 h45.62
  text "MTR1+" at 4122.5,2587.5 h45.62
  text "Com" at 2602.5,2527.5 h37.5 r90
  text "N.O." at 2752.5,2527.5 h37.5 r90
  text "N.C." at 2902.5,2527.5 h37.5 r90
  text "Com" at 3077.5,2527.5 h37.5 r90
  text "N.O." at 3227.5,2527.5 h37.5 r90
  text "N.C." at 3352.5,2527.5 h37.5 r90
  text "Operator" at 2290,2526 h37.5 r90
  text "Operator" at 2434,2526 h37.5 r90
  text "Pad 1" at 4122.5,2382.5 h45.62
  text "CYL RT" at 276.26,2291.7 h45.62
  text "Alarm Relay" at 3382,2282 h37.5
  text "Bypass Relay" at 2927.5,2277.5 h37.5
  text "Mag 1 On" at 2417.5,2197.5 h37.5 r90
  text "Pad 1" at 4122.5,2187.5 h45.62
  text "CYL RIU" at 276.26,2091.7 h45.62
  text "jumper in Pad 2 location" at 1714,2092 h56.88 r90
  text "For single door use, place" at 1604.18,2088 h56.88 r90
  text "MG1 -" at 4122.5,1977.5 h45.62
  text "SN RTN" at 276.26,1896.7 h45.62
  text "MG1 +" at 4122.5,1782.5 h45.62
  text "PWA 106016" at 1427.5,1722.5 h56.88 r90
  text "Siren 9" at 276.26,1686.7 h45.62
  text "Status Red" at 977.5,1627.5 h37.5 r90
  text "GREEN" at 276.26,1486.7 h45.62
  text "MTR2-" at 4122.5,1317.5 h45.62
  text "RED" at 276.26,1276.7 h45.62
  text "Status Grn" at 974,1266 h37.5 r90
  text "MTR2+" at 4122.5,1112.5 h45.62
  text "Pad 2" at 4122.5,917.5 h45.62
  text "GRND" at 262.5,857.5 h45.62
  text "Pad 2" at 4122.5,717.5 h45.62
  text "Cyl Active" at 2477.5,702.5 h37.5 r90
  text "VCC24" at 262.5,627.5 h45.62
  text "MG2 -" at 4122.5,512.5 h45.62
  text "Pad Active" at 2477.5,352.5 h37.5 r90
  text "Mag 2 On" at 3436,313.57 h37.5 r90
  text "MG2 +" at 4122.5,307.5 h45.62
  text "R" at 1831.5,275.5 h15 r90
Mechanical 3, DOC:
  text "DETEX CORPORATION / SHO MISAWA / PHONE: 800-729-3839 EXT.4377 / PCB: 106015 / PWA: 106016" at 4874,3823 h80
  text "FAB NOTES:" at 4888.25,3572.25 h80
  text "1. THE BOARD HAS TWO LAYERS" at 5050.25,3396.75 h80
  text "2. BOARD THICKNESS TO BE 63 MIL" at 5043.25,3223.75 h80
  text "3. BOARD TO HAVE 2 OZ CUPPER" at 5043.25,3060.75 h80
  text "4. MINIMUM CAD TRACE DIMENSIONS ARE: ____" at 5043.25,2880.75 h80
  text "5. PCB SHALL MEET FOLLOWING SPECIFICATIONS/REQUIREMENTS:" at 5047.25,2710.75 h80
  text "A. BOARD MATERIAL TO BE NEMA GRADE FR-4 GLASS EPOXY/UL94-VO RATED." at 5275.75,2575.25 h80
  text "B. MANUFACTURER AS PER IPC-6012 AND INSPECT AS PER IPC-A-600." at 5275.75,2415.25 h80
  text "C. PCB IS ROHS COMPLIANT AND MUST SURVIVE LEAD-FREE." at 5275.75,2245.25 h80
  text "D. FINISHED BOARD TO BE SOLDER MASKED OVER BARE COPPER." at 5275.75,2095.25 h80
  text "E. WHITE SILK SCREEN/BLUE SOLDERMASK ON BOTH SIDES." at 5275.75,1935.25 h80
  text "F. BOARD FINISH: ENIG (ELECTROLESS NICKEL IMMERSION GOLD)." at 5275.75,1765.25 h80
  text "G. UNLESS OTHERWISE SPECIFIED, ALL HOLES ARE TO BE PLATED THROUGH 0.001IN/(0.025MM) CUPPER MINIMUM." at 5275.75,1605.25 h80
  text "6. REFERENCES TO SYSTEM BOARD SCHEMATIC: UNKNOWN" at 5097.25,1423.25 h80
  text "7. 20 MIL V-GROOVE LINES." at 5097.25,1263.25 h80
  text "REVISION NOTES:" at 4958.25,641.25 h60
  text "106015 Rev A:  Incorporate design from 103845 and 104280 Dual Door PWA's." at 5216.75,524.9 h60
  text "Add teltale LED's, replace relay with two IPG511's.  Ass opto isolators for" at 5216.75,412.18 h60
  text "Status LED's, Pad and Cyl switches.  Route all I/O functions onto main" at 5216.75,299.46 h60
  text "connectors to simply wiring." at 5216.75,186.74 h60
  text "Rev B:  Replace .156 spacing connectors with 3.81mm metric connectors.  Fix" at 5216.75,74.02 h60
  text "logic erros on Cyl/Pad opto, add pullup to high side switch" at 5216.75,-38.7 h60
  text "Rev C:  Replace 3.81 connectors with separate .200\" connectors for each function" at 5216.75,-151.42 h60
  text "Retain  3.81 for relay connections for space.  clean up power trace routes" at 5216.75,-264.14 h60
  text "Rev D:  Add opto for siren drive/isolation." at 5216.75,-376.87 h60
  text "Rev D3:  Add TVS to Pad and Cyl inputs.  Redo gnd planes for better EMI.  Released to proto" at 5216.75,-489.59 h60
  text "06/16/15" at 5216.75,-602.31 h60
  text "Rev D3A:  Increase mounting hole tolerance.  Make one snap mount oval for REM stud variation." at 5216.75,-715.03 h60
  text "Rev D3B:  Add U14 TVS to 9 volt source for ESD issues." at 5216.75,-827.75 h60
  text "11.12.2018" at 5216.75,-946 h60
  text "Rev D3C:  Fixed unconnected ground pad on regulator due to imported design rules." at 5216.75,-1044 h60

## Text inside footprints (layer, text, board x,y; h text height)
C11: Bottom Overlay, Bot Silk "+" at 3272.5,1027.5 h62.5
C12: Bottom Overlay, Bot Silk "+" at 3272.5,1777.5 h62.5
C13: Bottom Overlay, Bot Silk "+" at 697.5,182.5 h62.5
JP2: Bottom Overlay, Bot Silk "1" at 315.75,1058.25 h62.5 r270
JP3: Bottom Overlay, Bot Silk "1" at 3646,1578 h62.5 r90
JP4: Bottom Overlay, Bot Silk "1" at 3675.23,104 h62.5 r90
JP5: Bottom Overlay, Bot Silk "1" at 243,3232 h62.5
K1: Bottom Overlay, Bot Silk "+" at 2602.5,3027.5 h37.5 r270
K2: Bottom Overlay, Bot Silk "+" at 3877.5,3017.5 h37.5 r270
T1: Bottom Overlay, Bot Silk "8" at 2152,2630 h62.5; Bottom Overlay, Bot Silk "1" at 3444,2622 h62.5